# EAGLE board Desafio (EAGLE 9.7.0)

Size 108.43 x 287.82 mm. Coordinates in mm from the lower left corner, seen from the top.
Outline: 0,0 108.43,0 108.43,287.82 0,287.82 0,0
Copper layers (1*16): Top 0.035mm / dielectric 1.5mm / Bottom 0.035mm
Design rules "default": minimum track width 6mil, minimum drill 0.35mm, track to track 6mil, track to pad 6mil, pad to pad 6mil, via to via 6mil, smd to smd 6mil, copper to edge 40mil, drill to drill 6mil, minimum pad ring 10mil, minimum via ring 8mil, stop-mask expansion 4mil, vias tented up to drill 0mil, thermal gap 10mil

## Footprints (pad centres in the part's own frame; a part is rotated, then mirrored left to right if it is on the bottom)
LED-RGB-5MM = drill 0.9: B 0.635,0.635; C -0.635,-0.635; G 1.905,-0.635; R -1.905,0.635
LEDRD254W60D565H860B = drill 0.981 pad 1.581: 1 -1.27,0; 2 1.27,0
LEDRD254W60D565H860B_G = drill 0.981 pad 1.581: 1 -1.27,0; 2 1.27,0
28027 = drill 1.016 long: 1 -2.54,0; 2 0,0; 3 2.54,0
RESAD1016W63L850D250B = drill 0.83 pad 1.43: 1 -5.08,0; 2 5.08,0
SWITCH-SPDT-PTH-8.5X3.7MM = drill 1.016 pad 1.88: 1 -2.54,0; 2 0,0; 3 2.54,0
ARDUINO-UNO-R3-SHIELD = drill 1.016 pad 1.88: 3.3V 24.13,-2.54; 5V 24.13,0; A0 24.13,12.7; A1 24.13,15.24; A2 24.13,17.78; A3 24.13,20.32; A4 24.13,22.86; A5 24.13,25.4; AREF -24.13,-13.97; D2 -24.13,20.32; D3 -24.13,17.78; D4 -24.13,15.24; D5 -24.13,12.7; D6 -24.13,10.16; D7 -24.13,7.62; D8 -24.13,3.81; D9 -24.13,1.27; D10 -24.13,-1.27; D11 -24.13,-3.81; D12 -24.13,-6.35; D13 -24.13,-8.89; GND@0 24.13,2.54; GND@1 24.13,5.08; GND@2 -24.13,-11.43; IOREF 24.13,-7.62; NC 24.13,-10.16; RES 24.13,-5.08; RX -24.13,25.4; SCL -24.13,-19.05; SDA -24.13,-16.51; TX -24.13,22.86; VIN 24.13,7.62

## Placement (x,y rotation side)
D3  LED-RGBRCBG-PTH  [LED-RGB-5MM]  77.37,280.33 0 top
D4  RED  [LEDRD254W60D565H860B]  93.36,96.59 180 top
D5  GREEN  [LEDRD254W60D565H860B_G]  100.98,96.59 180 top
PIR1  PIR-SENSOR_28027  [28027]  59.07,104.21 0 top
R1  220  [RESAD1016W63L850D250B]  81.18,265.09 90 top
R2  220  [RESAD1016W63L850D250B]  78.64,265.09 90 top
R3  220  [RESAD1016W63L850D250B]  73.56,265.09 90 top
R4  1k  [RESAD1016W63L850D250B]  99.71,88.97 90 top
S1  TOGGLE  [SWITCH-SPDT-PTH-8.5X3.7MM]  84.47,81.35 0 top
U1  ARDUINO-UNO-R3-SHIELD  [ARDUINO-UNO-R3-SHIELD]  73.91,211.02 270 top
U2  ARDUINO-UNO-R3-SHIELD  [ARDUINO-UNO-R3-SHIELD]  47.88,29.84 270 top

## Library data of the parts
D3 PIR1 R1-R4 S1 U1 U2 = Tinkercad
D4 = Tinkercad; CATEGORY: Opto-Electronic; SUB-CATEGORY: LED; VALUE: LED_RED
D5 = Tinkercad; CATEGORY: Opto-Electronic; SUB-CATEGORY: LED; VALUE: LED_GREEN

## Nets
D3_B: D3.B R2.2
D3_G: D3.G R1.2
D3_R: D3.R R3.2
D4_C: D4.2 R4.2
D5_C: D5.2 R4.2
U1_D3: R1.1 U1.D3
U1_D5: R2.1 U1.D5
U1_D6: R3.1 U1.D6
U1_GND: D3.C U1.GND@0 U1.GND@1 U1.GND@2
U2_5V: PIR1.2 S1.3 U2.5V
U2_D3: PIR1.1 U2.D3
U2_D4: D5.1 U2.D4
U2_D5: D4.1 U2.D5
U2_D6: S1.2 U2.D6
U2_GND: PIR1.3 R4.1 S1.1 U2.GND@0 U2.GND@1 U2.GND@2

## Tracks (layer width: path | path; a pad name or v marks a point on that pad's centre or on a via)
D3_B  (1 unrouted)
D3_G  (1 unrouted)
D3_R  (1 unrouted)
D4_C  (1 unrouted)
D5_C  (1 unrouted)
U1_D3  (1 unrouted)
U1_D5  (1 unrouted)
U1_D6  (1 unrouted)
U1_GND  (3 unrouted)
U2_5V  (2 unrouted)
U2_D3  (1 unrouted)
U2_D4  (1 unrouted)
U2_D5  (1 unrouted)
U2_D6  (1 unrouted)
U2_GND  (5 unrouted)